# EAGLE board PLL_Sensor (EAGLE 6.3)
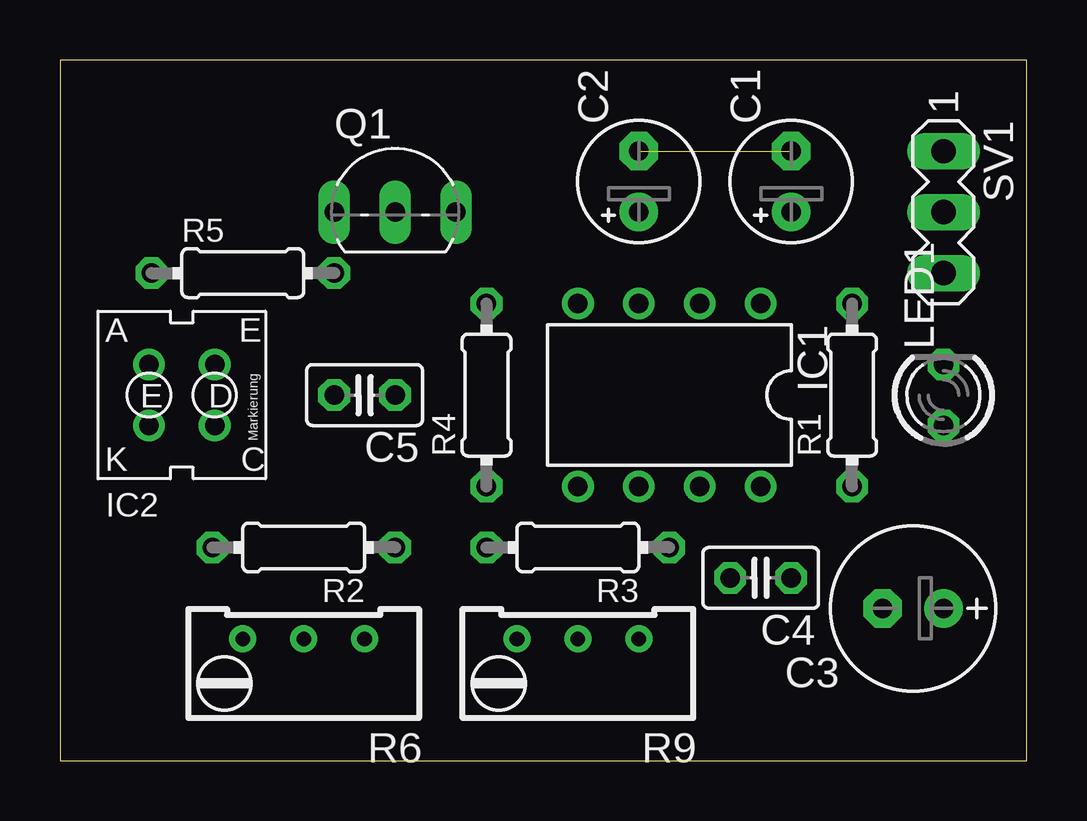
[diagram p0: board, top side]
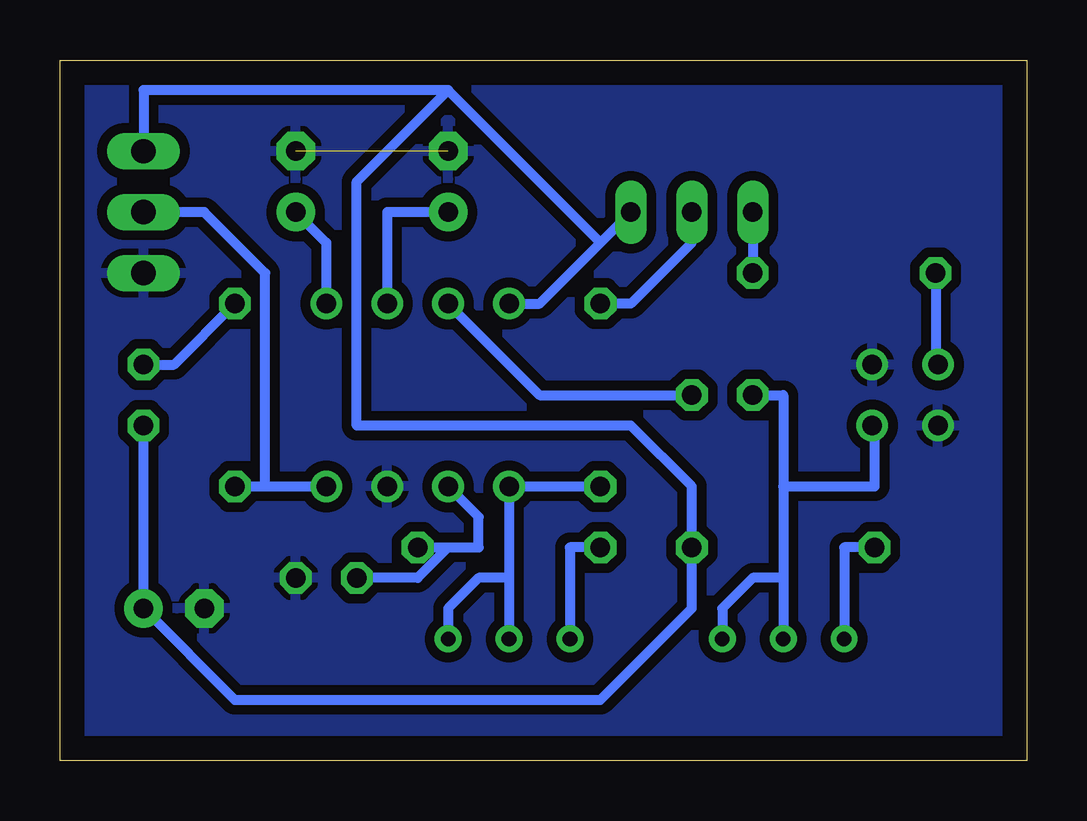
[diagram p1: board, bottom side, seen from below]

Size 40.31 x 29.2 mm. Coordinates in mm from the lower left corner, seen from the top.
Outline: 0,0 40.31,0 40.31,29.2 0,29.2 0,0
Copper layers (1*16): Top 0.035mm / dielectric 1.5mm / Bottom 0.035mm
Design rules "default *": minimum track width 16mil, minimum drill 24mil, track to track 16mil, track to pad 16mil, pad to pad 16mil, via to via 16mil, smd to smd 8mil, copper to edge 40mil, drill to drill 16mil, minimum pad ring 10mil, minimum via ring 8mil, stop-mask expansion 4mil, vias tented up to drill 0mil, thermal gap 10mil

## Footprints (pad centres in the part's own frame; a part is rotated, then mirrored left to right if it is on the bottom)
E2,5-5 = drill 0.813 pad 1.6: + -1.27,0 | drill 0.813 pad 1.6 octagon: - 1.27,0
E2,5-7 = drill 0.813 pad 1.6: + -1.27,0 | drill 0.813 pad 1.6 octagon: - 1.27,0
C025-025X050 = drill 0.813 octagon: 1 -1.27,0; 2 1.27,0
DIL08 = drill 0.813 pad 1.27: 1 -3.81,-3.81; 2 -1.27,-3.81; 3 1.27,-3.81; 4 3.81,-3.81; 5 3.81,3.81; 6 1.27,3.81; 7 -1.27,3.81; 8 -3.81,3.81
CNY70 = drill 0.813: DC 1.37,-1.27; DE 1.37,1.27; EA -1.37,1.27; EK -1.37,-1.27
LED3MM = drill 0.813 octagon: A -1.27,0; K 1.27,0
TO92-EBC = drill 0.813 long: B 0,-1.27; C -2.54,-1.27; E 2.54,-1.27
0204/7 = drill 0.813 octagon: 1 -3.81,0; 2 3.81,0
RTRIM64W = drill 0.61: 1 1.27,-2.54; 2 1.27,0; 3 1.27,2.54
MA03-1 = drill 1.016 long: 1 -2.54,0; 2 0,0; 3 2.54,0

## Placement (x,y rotation side)
C1  1uF  [E2,5-5]  30.48,24.13 90 top
C2  1uF  [E2,5-5]  24.13,24.13 90 top
C3  100uF  [E2,5-7]  35.56,6.35 180 top
C4  33nF  [C025-025X050]  29.21,7.62 180 top
C5  100nF  [C025-025X050]  12.7,15.24 180 top
IC1  LM567N  [DIL08]  25.4,15.24 180 top
IC2  CNY70  [CNY70]  5.08,15.24 0 top
LED1  [LED3MM]  36.83,15.24 90 top
Q1  BC558B  [TO92-EBC]  13.97,24.13 0 top
R1  1k  [0204/7]  33.02,15.24 90 top
R2  4k7  [0204/7]  10.16,8.89 180 top
R3  4k7  [0204/7]  21.59,8.89 180 top
R4  [0204/7]  17.78,15.24 90 top
R5  [0204/7]  7.62,20.32 0 top
R6  10k  [RTRIM64W]  10.16,3.81 90 top
R9  10k  [RTRIM64W]  21.59,3.81 90 top
SV1  [MA03-1]  36.83,22.86 270 top

## Library data of the parts
C1-C5 R1-R5 = rcl
IC1 = linear
IC2 = CNY70
LED1 = led
Q1 = transistor-pnp
R6 R9 = resistor
SV1 = con-lstb; OC_FARNELL: unknown; OC_NEWARK: unknown

## Nets
+5V: C3.+ IC1.4 LED1.A Q1.E R2.1 SV1.1
GND: C1.- C2.- C3.- C4.1 IC1.7 IC2.DE IC2.EK SV1.3
N$1: IC1.8 R1.1 SV1.2
N$2: LED1.K R1.2
N$3: C2.+ IC1.2
N$4: C1.+ IC1.1
N$5: C5.1 IC1.3
N$6: C5.2 IC2.DC R6.1 R6.2
N$7: Q1.C R5.2
N$8: R2.2 R6.3
N$9: IC2.EA R5.1
N$10: Q1.B R4.2
N$12: IC1.5 R4.1 R9.1 R9.2
N$13: R3.2 R9.3
N$14: C4.2 IC1.6 R3.1

## Tracks (layer width: path | path; a pad name or v marks a point on that pad's centre or on a via)
+5V
  Bottom 0.406: 17.78,21.59 20.32,19.05 IC1.4 | 17.78,21.59 Q1.E | SV1.1 36.83,27.94 24.13,27.94 | 17.78,21.59 24.13,27.94 | LED1.A C3.+ 33.02,2.54 17.78,2.54 13.97,6.35 R2.1 13.97,11.43 16.51,13.97 27.94,13.97 27.94,24.13 24.13,27.94
GND  (1 unrouted)
  pour Bottom: 0,29.21 40.64,29.21 40.64,0 0,0
N$1
  Bottom 0.406: R1.1 31.75,11.43 | 31.75,11.43 IC1.8 | SV1.2 34.29,22.86 31.75,20.32 31.75,11.43
N$2
  Bottom 0.406: R1.2 35.56,16.51 LED1.K
N$3
  Bottom 0.406: IC1.2 26.67,22.86 C2.+
N$4
  Bottom 0.406: IC1.1 29.21,21.59 C1.+
N$5
  Bottom 0.406: C5.1 20.32,15.24 IC1.3
N$6
  Bottom 0.406: 10.16,11.43 10.16,15.24 C5.2 | 10.16,11.43 10.16,7.62 | 10.16,7.62 R6.2 | R6.1 12.7,6.35 11.43,7.62 10.16,7.62 | 10.16,11.43 6.35,11.43 6.35,13.97 IC2.DC
N$7
  Bottom 0.406: Q1.C R5.2
N$8
  Bottom 0.406: R6.3 7.62,8.89 R2.2
N$9
  Bottom 0.406: R5.1 3.81,16.51 IC2.EA
N$10
  Bottom 0.406: R4.2 16.51,19.05 13.97,21.59 Q1.B
N$12
  Bottom 0.406: 21.59,7.62 IC1.5 R4.1 | 21.59,7.62 R9.2 | R9.1 24.13,6.35 22.86,7.62 21.59,7.62
N$13
  Bottom 0.406: R9.3 19.05,8.89 R3.2
N$14
  Bottom 0.406: IC1.6 22.86,10.16 22.86,8.89 24.13,8.89 | R3.1 24.13,8.89 | C4.2 25.4,7.62 24.13,8.89